# EAGLE board circuitos (EAGLE 9.7.0)

Size 183.23 x 54.31 mm. Coordinates in mm from the lower left corner, seen from the top.
Outline: 0,0 183.23,0 183.23,54.31 0,54.31 0,0
Copper layers (1*16): Top 0.035mm / dielectric 1.5mm / Bottom 0.035mm
Design rules "default": minimum track width 6mil, minimum drill 0.35mm, track to track 6mil, track to pad 6mil, pad to pad 6mil, via to via 6mil, smd to smd 6mil, copper to edge 40mil, drill to drill 6mil, minimum pad ring 10mil, minimum via ring 8mil, stop-mask expansion 4mil, vias tented up to drill 0mil, thermal gap 10mil

## Footprints (pad centres in the part's own frame; a part is rotated, then mirrored left to right if it is on the bottom)
DIODE-AXIAL = drill 1: 1 -5.08,0; 2 5.08,0
BATTERY-GENERIC = drill 1.118 pad 3.15 octagon: + 2.54,0; - -2.54,0
RESAD1016W63L850D250B = drill 0.83 pad 1.43: 1 -5.08,0; 2 5.08,0

## Placement (x,y rotation side)
D1  DIODEDIODE-AXIAL  [DIODE-AXIAL]  174.22,6.33 0 top
P1  BATTERYGENERIC  [BATTERY-GENERIC]  12.75,46.06 180 top
P2  BATTERYGENERIC  [BATTERY-GENERIC]  157.96,45.23 180 top
R1  1k  [RESAD1016W63L850D250B]  8.97,15.83 180 top
R2  1k  [RESAD1016W63L850D250B]  137.05,6.47 0 top

## Library data of the parts
D1 P1 P2 R1 R2 = Tinkercad

## Nets
P1-: P1.- R1.1
P2+: P2.+ R2.1
P2-: D1.2 P2.-
R2_2: D1.1 R2.2

## Tracks (layer width: path | path; a pad name or v marks a point on that pad's centre or on a via)
P1-  (1 unrouted)
P2+  (1 unrouted)
P2-  (1 unrouted)
R2_2  (1 unrouted)